# EAGLE board Procesamiento (EAGLE 7.7.0)
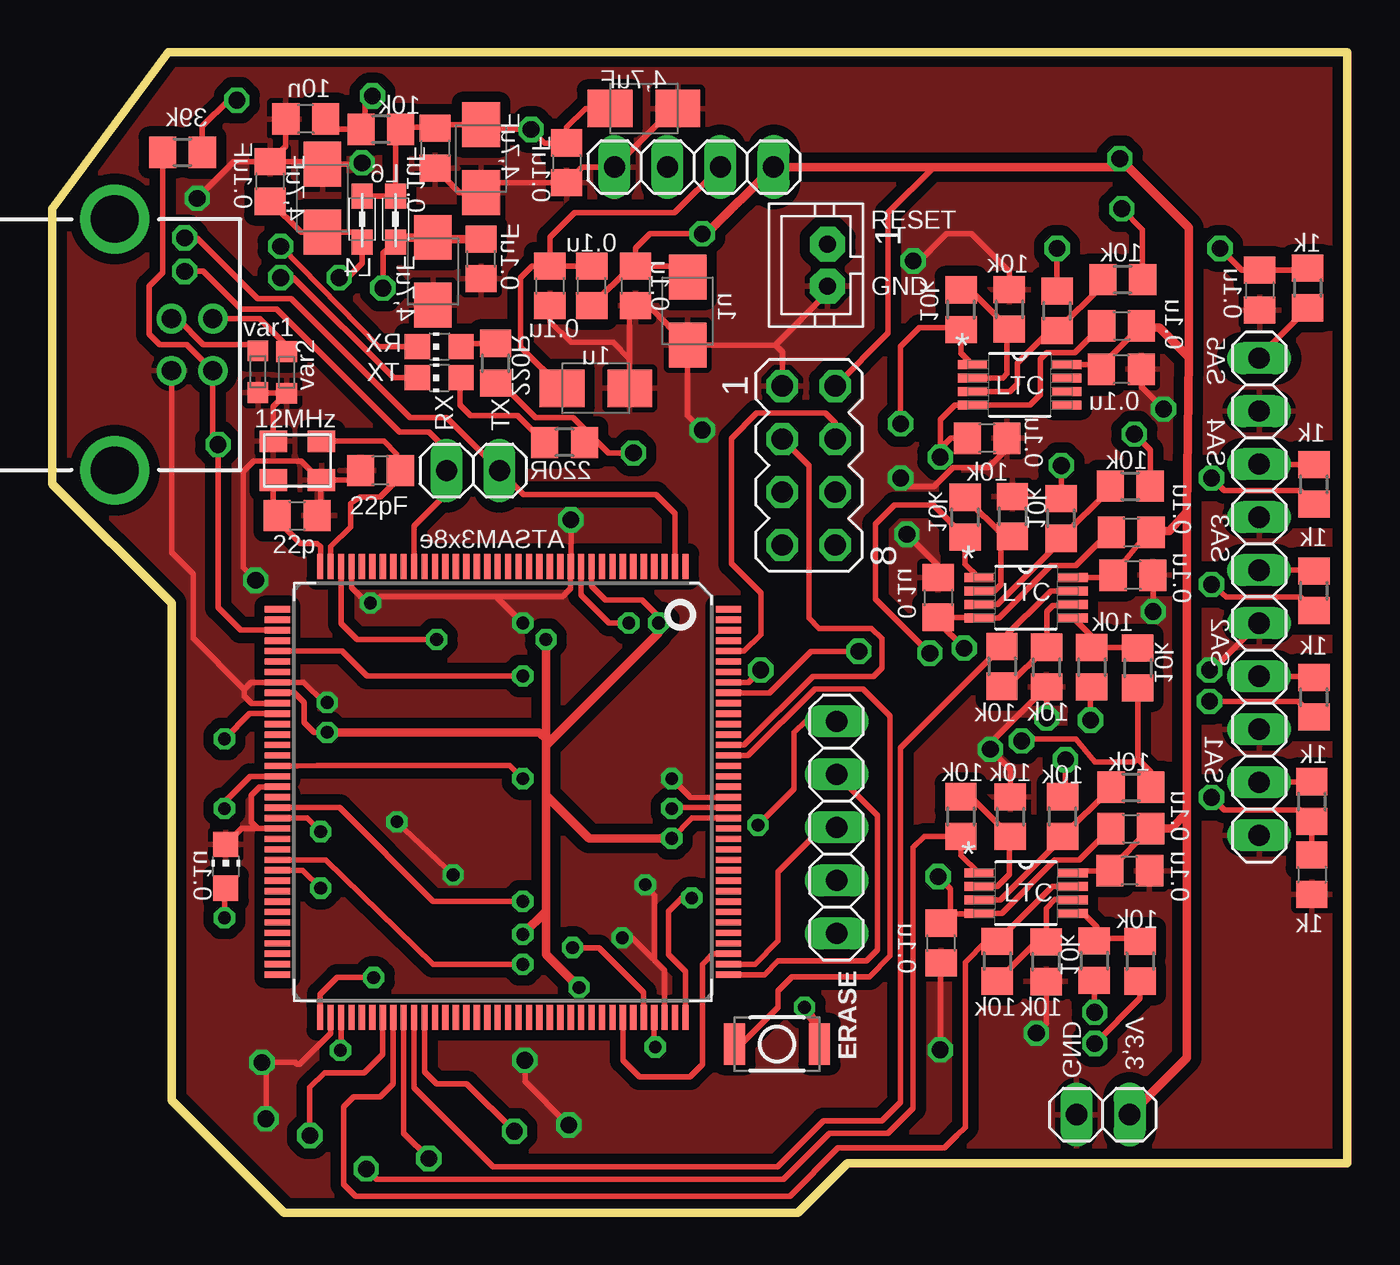
[diagram p0: board, top side]
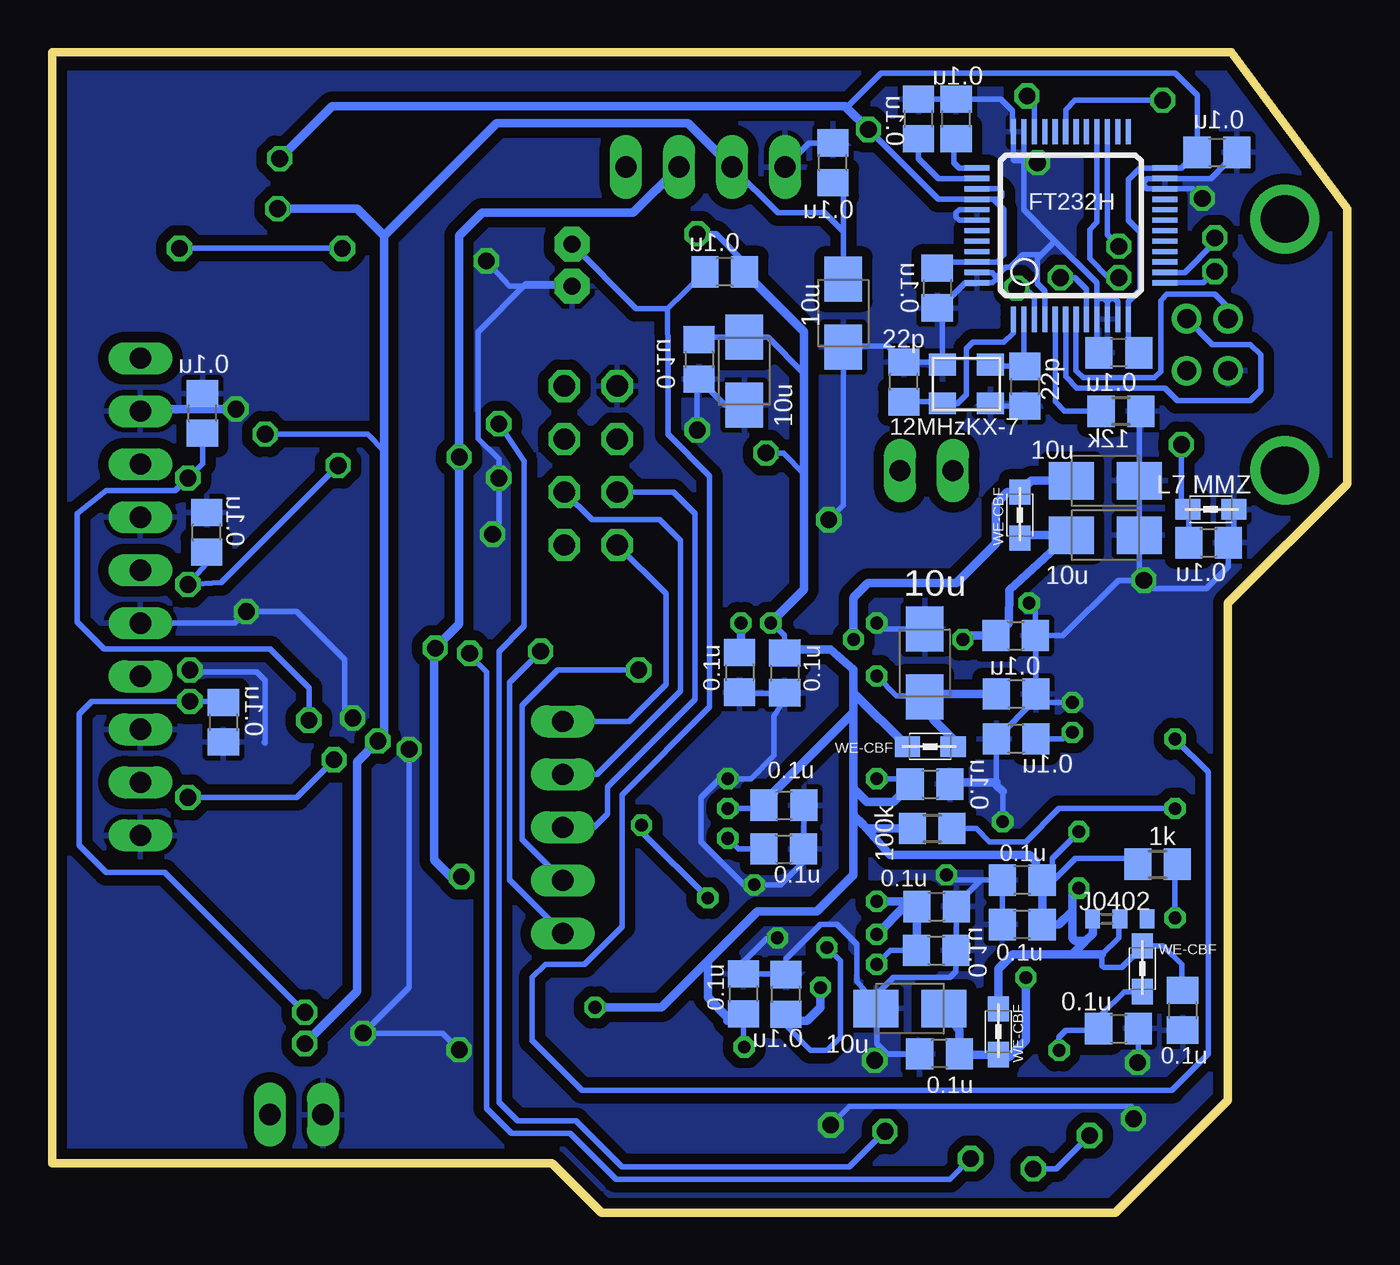
[diagram p1: board, bottom side, seen from below]

Size 62.05 x 55.6 mm. Coordinates in mm from the lower left corner, seen from the top.
Outline: 62.05,55.6 5.56,55.6 0,48.1 0,34.92 5.71,29.21 5.71,5.4 11.11,0 35.72,0 38.1,2.38 62.05,2.38 62.05,55.6
Copper layers (1*16): Top 0.035mm / dielectric 1.6mm / Bottom 0.035mm
Design rules "default *": minimum track width 10mil, minimum drill 24mil, track to track 8mil, track to pad 8mil, pad to pad 8mil, via to via 8mil, smd to smd 8mil, copper to edge 8mil, drill to drill 8mil, minimum pad ring 10mil, minimum via ring 8mil, stop-mask expansion 4mil, vias tented up to drill 0mil, thermal gap 10mil
Net classes: 1 USB: width 0.203 mm, drill 0.254 mm, clearance 0.203 mm; 2 gnd1: width 0.203 mm, drill 0.254 mm, clearance 0.203 mm; 3 usbvcc: width 0.203 mm, drill 0.254 mm, clearance 0.203 mm; 4 USBpair: width 0.203 mm, drill 0.254 mm, clearance 0.203 mm; 5 UA1: width 0.127 mm, drill 0.254 mm, clearance 0.127 mm

## Footprints (pad centres in the part's own frame; a part is rotated, then mirrored left to right if it is on the bottom)
J0402 = smd 0.7 x 0.9: 1 -0.65,0; 2 0.65,0; 3 1.95,0
C0805 = smd 1.3 x 1.5: 1 -0.95,0; 2 0.95,0
B/3528-21W = smd 2.15 x 1.8: + 1.625,0; - -1.625,0
SMD_157SW = smd 1.016 x 1.981: 1 -2.032,0; 2 2.032,0
LQFP48 = smd 0.25 x 1.2: 1 -2.75,-4.5; 2 -2.25,-4.5; 3 -1.75,-4.5; 4 -1.25,-4.5; 5 -0.75,-4.5; 6 -0.25,-4.5; 7 0.25,-4.5; 8 0.75,-4.5; 9 1.25,-4.5; 10 1.75,-4.5; 11 2.25,-4.5; 12 2.75,-4.5; 25 2.75,4.5; 26 2.25,4.5; 27 1.75,4.5; 28 1.25,4.5; 29 0.75,4.5; 30 0.25,4.5; 31 -0.25,4.5; 32 -0.75,4.5; 33 -1.25,4.5; 34 -1.75,4.5; 35 -2.25,4.5; 36 -2.75,4.5 | smd 1.2 x 0.25: 13 4.5,-2.75; 14 4.5,-2.25; 15 4.5,-1.75; 16 4.5,-1.25; 17 4.5,-0.75; 18 4.5,-0.25; 19 4.5,0.25; 20 4.5,0.75; 21 4.5,1.25; 22 4.5,1.75; 23 4.5,2.25; 24 4.5,2.75; 37 -4.5,2.75; 38 -4.5,2.25; 39 -4.5,1.75; 40 -4.5,1.25; 41 -4.5,0.75; 42 -4.5,0.25; 43 -4.5,-0.25; 44 -4.5,-0.75; 45 -4.5,-1.25; 46 -4.5,-1.75; 47 -4.5,-2.25; 48 -4.5,-2.75
1X05 = drill 1.016 long: 1 -5.08,0; 2 -2.54,0; 3 0,0; 4 2.54,0; 5 5.08,0
1X10 = drill 1.016 long: 1 -11.43,0; 2 -8.89,0; 3 -6.35,0; 4 -3.81,0; 5 -1.27,0; 6 1.27,0; 7 3.81,0; 8 6.35,0; 9 8.89,0; 10 11.43,0
1X04 = drill 1.016 long: 1 -3.81,0; 2 -1.27,0; 3 1.27,0; 4 3.81,0
1X02 = drill 1.016 long: 1 -1.27,0; 2 1.27,0
0805 = smd 1.2 x 1: 1 -1.1,0; 2 1.1,0
CHIP-LED0805 = smd 1.2 x 1.2: A 0,-1.05; C 0,1.05
JST-PH2 = drill 0.813 pad 1.676 octagon: 1 1,0; 2 -1,0
R0805 = smd 1.3 x 1.5: 1 -0.95,0; 2 0.95,0
MA04-2 = drill 1.016 octagon: 1 -3.81,-1.27; 2 -3.81,1.27; 3 -1.27,-1.27; 4 -1.27,1.27; 5 1.27,-1.27; 6 1.27,1.27; 7 3.81,-1.27; 8 3.81,1.27
SOP65P490X110-8N = smd 1.397 x 0.432: 1 -2.261,0.965; 2 -2.261,0.33; 3 -2.261,-0.33; 4 -2.261,-0.965; 5 2.261,-0.965; 6 2.261,-0.33; 7 2.261,0.33; 8 2.261,0.965
LQFP144 = smd 0.3 x 1.2: 1 -8.75,-10.8; 2 -8.25,-10.8; 3 -7.75,-10.8; 4 -7.25,-10.8; 5 -6.75,-10.8; 6 -6.25,-10.8; 7 -5.75,-10.8; 8 -5.25,-10.8; 9 -4.75,-10.8; 10 -4.25,-10.8; 11 -3.75,-10.8; 12 -3.25,-10.8; 13 -2.75,-10.8; 14 -2.25,-10.8; 15 -1.75,-10.8; 16 -1.25,-10.8; 17 -0.75,-10.8; 18 -0.25,-10.8; 19 0.25,-10.8; 20 0.75,-10.8; 21 1.25,-10.8; 22 1.75,-10.8; 23 2.25,-10.8; 24 2.75,-10.8; 25 3.25,-10.8; 26 3.75,-10.8; 27 4.25,-10.8; 28 4.75,-10.8; 29 5.25,-10.8; 30 5.75,-10.8; 31 6.25,-10.8; 32 6.75,-10.8; 33 7.25,-10.8; 34 7.75,-10.8; 35 8.25,-10.8; 36 8.75,-10.8; 73 8.75,10.8; 74 8.25,10.8; 75 7.75,10.8; 76 7.25,10.8; 77 6.75,10.8; 78 6.25,10.8; 79 5.75,10.8; 80 5.25,10.8; 81 4.75,10.8; 82 4.25,10.8; 83 3.75,10.8; 84 3.25,10.8; 85 2.75,10.8; 86 2.25,10.8; 87 1.75,10.8; 88 1.25,10.8; 89 0.75,10.8; 90 0.25,10.8; 91 -0.25,10.8; 92 -0.75,10.8; 93 -1.25,10.8; 94 -1.75,10.8; 95 -2.25,10.8; 96 -2.75,10.8; 97 -3.25,10.8; 98 -3.75,10.8; 99 -4.25,10.8; 100 -4.75,10.8; 101 -5.25,10.8; 102 -5.75,10.8; 103 -6.25,10.8; 104 -6.75,10.8; 105 -7.25,10.8; 106 -7.75,10.8; 107 -8.25,10.8; 108 -8.75,10.8 | smd 1.2 x 0.3: 37 10.8,-8.75; 38 10.8,-8.25; 39 10.8,-7.75; 40 10.8,-7.25; 41 10.8,-6.75; 42 10.8,-6.25; 43 10.8,-5.75; 44 10.8,-5.25; 45 10.8,-4.75; 46 10.8,-4.25; 47 10.8,-3.75; 48 10.8,-3.25; 49 10.8,-2.75; 50 10.8,-2.25; 51 10.8,-1.75; 52 10.8,-1.25; 53 10.8,-0.75; 54 10.8,-0.25; 55 10.8,0.25; 56 10.8,0.75; 57 10.8,1.25; 58 10.8,1.75; 59 10.8,2.25; 60 10.8,2.75; 61 10.8,3.25; 62 10.8,3.75; 63 10.8,4.25; 64 10.8,4.75; 65 10.8,5.25; 66 10.8,5.75; 67 10.8,6.25; 68 10.8,6.75; 69 10.8,7.25; 70 10.8,7.75; 71 10.8,8.25; 72 10.8,8.75; 109 -10.8,8.75; 110 -10.8,8.25; 111 -10.8,7.75; 112 -10.8,7.25; 113 -10.8,6.75; 114 -10.8,6.25; 115 -10.8,5.75; 116 -10.8,5.25; 117 -10.8,4.75; 118 -10.8,4.25; 119 -10.8,3.75; 120 -10.8,3.25; 121 -10.8,2.75; 122 -10.8,2.25; 123 -10.8,1.75; 124 -10.8,1.25; 125 -10.8,0.75; 126 -10.8,0.25; 127 -10.8,-0.25; 128 -10.8,-0.75; 129 -10.8,-1.25; 130 -10.8,-1.75; 131 -10.8,-2.25; 132 -10.8,-2.75; 133 -10.8,-3.25; 134 -10.8,-3.75; 135 -10.8,-4.25; 136 -10.8,-4.75; 137 -10.8,-5.25; 138 -10.8,-5.75; 139 -10.8,-6.25; 140 -10.8,-6.75; 141 -10.8,-7.25; 142 -10.8,-7.75; 143 -10.8,-8.25; 144 -10.8,-8.75
USB-B-PTH = drill 0.914: D+ 0,1.25; D- 1.981,1.25; GND 0,-1.25; VBUS 1.981,-1.25 | drill 2.286: P$1 -2.718,-6.02; P$2 -2.718,6.02
CRYSTAL-3.2-2.5 = smd 1.3 x 1.05: 1 -1.15,-0.925; 2 1.15,-0.925; 3 1.15,0.925; 4 -1.15,0.925
CT/CN0603 = smd 1 x 1: 1 -1,0; 2 1,0

## Placement (x,y rotation side)
BR1  NM  [J0402]  10.25,14.08 180 bottom
C1  [C0805]  51.62,16.39 180 top
C2  [C0805]  42.59,12.93 90 top
C3  [C0805]  51.67,18.41 0 top
C4  [C0805]  51.78,30.55 180 top
C5  [C0805]  42.44,29.48 270 top
C6  [C0805]  51.7,32.6 0 top
C7  [C0805]  51.22,40.41 180 top
C8  [C0805]  44.79,37.11 180 top
C9  [C0805]  51.23,42.5 0 top
C10  [C0805]  27.95,44.4 270 top
C11  [C0805]  23.84,44.4 270 top
C12  [C0805]  25.84,44.4 90 top
C13  [C0805]  24.65,50.3 90 bottom
C14  [C0805]  60.34,16.2 270 top
C15  [C0805]  53.84,23.5 270 bottom
C16  [C0805]  54.65,32.6 90 bottom
C17  [C0805]  54.84,38.3 90 bottom
C18  [C0805]  57.84,44.2 270 top
CA1  0,1u  [C0805]  31.05,40.88 270 bottom
CA2  10u  [B/3528-21W]  28.89,40.32 90 bottom
CA3  100n  [C0805]  28.92,10.49 90 bottom
CA4  100n  [C0805]  15.57,15.94 180 bottom
CA5  100n  [C0805]  15.57,13.81 180 bottom
CA6  100n  [C0805]  19.99,20.54 0 bottom
CA7  10u  [B/3528-21W]  30.45,43.2 90 top
CA8  100n  [C0805]  26.96,25.86 270 bottom
CA9  100n  [C0805]  26.99,19.53 0 bottom
CA10  100n  [C0805]  15.86,24.86 0 bottom
CA11  10u  [B/3528-21W]  20.24,26.35 270 bottom
CA12  100n  [C0805]  19.54,7.62 180 bottom
CA13  10u  [B/3528-21W]  20.95,9.79 0 bottom
CA14  10u  [B/3528-21W]  11.6,35.07 180 bottom
CA15  100n  [C0805]  19.67,14.67 0 bottom
CA16  100n  [C0805]  19.7,12.57 0 bottom
CA17  100n  [C0805]  29.11,25.89 270 bottom
CA18  100n  [C0805]  15.86,22.7 180 bottom
CA19  100n  [C0805]  26.89,10.46 90 bottom
CA20  100n  [C0805]  27,17.43 0 bottom
CA21  10n  [C0805]  29.83,45.07 180 bottom
CA22  100n  [C0805]  7.89,9.7 270 bottom
CA23  100n  [C0805]  10.97,8.83 0 bottom
CA24  22p  [C0805]  11.73,33.4 0 top
CA25  22pF  [C0805]  15.73,35.56 180 top
CA26  100n  [C0805]  15.89,27.65 0 bottom
CA27  10u  [B/3528-21W]  11.6,32.47 180 bottom
CA28  10u  [B/3528-21W]  26.05,39.5 180 top
CA29  10u  [B/3528-21W]  24.15,43.1 90 bottom
CA30  10u  [B/3528-21W]  20.55,50.5 90 top
CA31  0,1u  [C0805]  18.34,51 270 top
CA32  10u  [B/3528-21W]  18.24,45.1 90 top
CA33  0,1u  [C0805]  20.55,45.7 270 top
CA34  10u  [B/3528-21W]  12.94,48.6 270 top
CA35  10n  [C0805]  6.64,32.1 0 bottom
CA37  0,1u  [C0805]  10.45,49.4 90 top
CA38  10u  [B/3528-21W]  28.34,52.9 180 top
CA39  0,1u  [C0805]  24.65,50.3 270 top
CA40  100n  [C0805]  20.55,52.4 90 bottom
CA41  100n  [C0805]  18.74,52.4 90 bottom
CA42  100n  [C0805]  10.95,41.2 180 bottom
CA43  100n  [C0805]  6.24,50.8 0 bottom
CA44  100n  [C0805]  19.65,44.3 270 bottom
CA45  10n  [C0805]  12.15,52.4 180 top
CA46  22pF  [C0805]  15.44,39.6 270 bottom
CA47  22p  [C0805]  21.24,39.8 90 bottom
ERASE  [SMD_157SW]  34.72,8.08 180 top
IC1  FT232H  [LQFP48]  13.24,47.3 0 bottom
JP1  [1X05]  37.58,18.46 90 top
JP2  [1X10]  57.82,29.52 90 top
JP3  [1X04]  30.75,50.1 0 top
JP4  [1X02]  50.34,4.7 180 top
JP8  [1X02]  20.16,35.56 0 top
L1  MH2029-300Y  [0805]  16.72,8.68 270 bottom
L2  MH2029-300Y  [0805]  19.98,22.33 0 bottom
L3  MH2029-300Y  [0805]  9.82,11.7 270 bottom
L4  MMZ2012Y601B  [0805]  14.85,47.6 90 top
L5  MH2029-300Y  [0805]  15.69,33.43 270 bottom
L6  MMZ2012Y601B  [0805]  16.45,47.6 90 top
L7  MMZ2012Y601B  [0805]  6.54,33.7 180 bottom
ON  GREEN  [CHIP-LED0805]  8.32,16.61 0 top
ON1  GREEN  [CHIP-LED0805]  18.55,41.5 90 top
ON2  GREEN  [CHIP-LED0805]  18.55,40 90 top
P1  [JST-PH2]  37.15,45.4 90 top
R1  [R0805]  45.9,18.98 270 top
R2  [R0805]  43.54,18.99 90 top
R3  [R0805]  48.4,18.99 90 top
R4  [R0805]  51.68,20.39 0 top
R5  [R0805]  47.62,12.03 90 top
R6  [R0805]  45.27,12.05 270 top
R7  [R0805]  49.92,12.08 270 top
R8  [R0805]  52.12,12.05 270 top
R9  [R0805]  46,33.36 270 top
R10  [R0805]  43.73,33.33 90 top
R11  [R0805]  48.33,33.27 90 top
R12  [R0805]  51.65,34.81 0 top
R13  [R0805]  47.63,26.15 90 top
R14  [R0805]  45.5,26.18 270 top
R15  [R0805]  49.8,26.14 270 top
R16  [R0805]  52,26.1 270 top
R17  [R0805]  45.85,43.28 270 top
R18  [R0805]  43.54,43.27 90 top
R19  [R0805]  48.14,43.21 90 top
R20  [R0805]  51.29,44.71 0 top
R21  [R0805]  60.34,19.7 90 top
R22  [R0805]  60.45,24.7 90 top
R23  [R0805]  60.45,29.8 90 top
R24  [R0805]  60.45,34.9 90 top
R25  [R0805]  60.14,44.3 270 top
R26  [R0805]  15.74,51.9 180 top
R27  [R0805]  10.85,38.4 180 bottom
R28  [R0805]  6.24,50.8 0 top
RA1  1k  [R0805]  21.24,40.7 90 top
RA2  1k  [R0805]  24.55,36.9 180 top
RA3  1k  [R0805]  9.09,16.7 0 bottom
RA5  100k  [R0805]  19.89,18.42 180 bottom
SV1  [MA04-2]  36.25,35.8 270 top
U1  LTC6244CMS8PBF  [SOP65P490X110-8N]  46.65,15.31 0 top
U2  LTC6244CMS8PBF  [SOP65P490X110-8N]  46.65,29.47 0 top
U3  LTC6244CMS8PBF  [SOP65P490X110-8N]  46.35,39.66 0 top
UA1  ATSAM3X8EA-AU  [LQFP144]  21.59,20.16 180 top
X3  USBPTH  [USB-B-PTH]  5.71,41.59 0 top
Y1  12MHz KX-7 20pF  [CRYSTAL-3.2-2.5]  11.75,36.04 0 top
Y2  12MHzKX-7  [CRYSTAL-3.2-2.5]  18.24,39.7 0 bottom
Z1  CG0603MLC-05E  [CT/CN0603]  9.86,40.29 270 top
Z2  CG0603MLC-05E  [CT/CN0603]  11.23,40.26 270 top

## Library data of the parts
BR1 = bibaja
C1-C18 CA1-CA35 CA37-CA47 R1-R28 RA1-RA3 RA5 = rcl
ERASE UA1 Y1 Y2 = SmartPrj
IC1 = ftdichip-6
JP1-JP4 JP8 = pinhead
L1-L7 = wuerth-elektronik
ON ON1 ON2 = led
P1 = jst-ph
SV1 = con-lstb; OC_FARNELL: unknown; OC_NEWARK: unknown
U1-U3 = LTC6244CMS8PBF; AVAILABILITY: Good; DESCRIPTION: LTC6244 - Dual 50MHz, Low Noise, Rail-to-Rail, CMOS Op Amp; MF: Linear Technology; MP: LTC6244CMS8#PBF; PACKAGE: MSOP-8 Linear Technology; PRICE: 2.34 USD
X3 = usb
Z1 Z2 = varistor

## Nets
+1: C13.1 CA29.+ JP3.2 R4.2 R8.2 R12.2 R16.2 R20.2
+3,3: BR1.2 BR1.3 C1.2 C3.2 C4.2 C6.2 C7.2 C9.2 C10.1 C12.1 CA1.1 CA2.+ CA3.1 CA4.1 CA5.1 CA6.1 CA7.+ CA8.1 CA9.1 CA21.1 CA22.1 CA30.+ CA31.1 CA38.+ CA39.1 CA42.1 CA43.1 CA44.1 ERASE.1 IC1.12 IC1.24 IC1.39 IC1.40 IC1.46 JP3.4 JP4.1 L1.1 L2.1 L3.1 L4.2 L6.2 R26.1 RA1.1 RA2.1 RA3.1 RA5.2 SV1.2 U1.8 U2.8 U3.8 UA1.11 UA1.52 UA1.57 UA1.62 UA1.105 UA1.125
-3,3: C2.2 C3.1 C5.2 C6.1 C8.2 C9.1 C11.1 C12.2 CA28.+ JP3.3 U1.4 U2.4 U3.4
A0: UA1.144
A1: UA1.139
A1+: R3.1 R4.1 U1.3
A1-: R1.2 R2.2 U1.2
A2: UA1.112
A2+: R7.1 R8.1 U1.5
A2-: R5.2 R6.2 U1.6
A3+: R11.1 R12.1 U2.3
A3-: R9.2 R10.2 U2.2
A4+: R15.1 R16.1 U2.5
A4-: R13.2 R14.2 U2.6
A5+: R19.1 R20.1 U3.3
A5-: R17.2 R18.2 U3.2
AC7: IC1.31 R28.2
AD0: UA1.78
AO1: C14.1 R3.2 R21.1
AO2: C15.1 R7.2 R22.1
AO3: C16.1 R11.2 R23.1
AO4: C17.1 R15.2 R24.1
AO5: C18.1 R19.2 R25.1
AREF: BR1.1
AVREF: CA23.1 L3.2 UA1.75
CE: SV1.3 UA1.131
CLOCK: UA1.133
CSN: SV1.4 UA1.140
D+ [USBpair]: IC1.7 X3.D+ Z1.1
D- [USBpair]: IC1.6 X3.D- Z2.1
DATA: UA1.132
DL: R2.1 U1.1 UA1.79
DR: R6.1 U1.7 UA1.80
EL: R10.1 U2.1 UA1.81
EN1: UA1.135
EN2: UA1.134
EN3: UA1.102 UA1.111
ER: R14.1 U2.7 UA1.82
ERASE_S: ERASE.2 UA1.130
GND: C1.1 C2.1 C4.1 C5.1 C7.1 C8.1 C10.2 C11.2 C13.2 C14.2 C15.2 C16.2 C17.2 C18.2 CA1.2 CA2.- CA3.2 CA4.2 CA5.2 CA6.2 CA7.- CA8.2 CA9.2 CA10.2 CA11.- CA12.2 CA13.- CA14.- CA15.2 CA16.2 CA17.2 CA18.2 CA19.2 CA20.2 CA22.2 CA23.2 CA24.2 CA25.2 CA26.2 CA27.- CA28.- CA29.- CA30.- CA31.2 CA32.- CA33.2 CA34.- CA35.2 CA37.2 CA38.- CA39.2 CA40.2 CA41.2 CA42.2 CA43.2 CA44.2 CA45.2 CA46.2 CA47.2 IC1.4 IC1.9 IC1.10 IC1.11 IC1.22 IC1.23 IC1.35 IC1.36 IC1.41 IC1.42 IC1.47 IC1.48 JP2.1 JP2.3 JP2.5 JP2.7 JP2.9 JP3.1 JP4.2 L7.1 ON.C P1.2 R1.1 R5.1 R9.1 R13.1 R17.1 R27.1 SV1.1 UA1.12 UA1.33 UA1.44 UA1.46 UA1.54 UA1.58 UA1.74 UA1.106 UA1.126 X3.GND Y1.2 Y1.4 Y2.2 Y2.4 Z1.2 Z2.2
IR: R18.1 U3.1 UA1.83
LED1: UA1.20
LED2: UA1.21
LED3: UA1.1
MASTER-RESET: CA21.2 P1.1 UA1.47
MISO: JP1.5 SV1.7 UA1.108
MOSI: JP1.4 SV1.6 UA1.109
N$1: UA1.94
N$3: ON.A RA3.2
N$4: ON1.A RA1.2
N$5: ON2.A RA2.2
N$7: RA5.1 UA1.53
N$10: UA1.99
N$13: UA1.84
N$14: UA1.85
N$17: UA1.86
N$19: UA1.87
NC: SV1.8
NCS: JP1.2 UA1.137
NCS1: JP1.1 UA1.136
PC18: UA1.100
REF_H: IC1.5 R27.2
RESET: CA45.1 IC1.34 R26.2
RX: IC1.13 JP8.1 UA1.27
RXD1: UA1.5
RXL: UA1.103
RXLED: IC1.27 ON1.C
SA1: JP2.2 R21.2
SA2: JP2.4 R22.2
SA3: JP2.6 R23.2
SA4: JP2.8 R24.2
SA5: JP2.10 R25.2
SPCK: JP1.3 SV1.5 UA1.110
SS3: UA1.142
TX: IC1.14 JP8.2 UA1.2
TXD1: UA1.6
TXLED: IC1.28 ON2.C
UOTGID: UA1.129
VCCAH: CA41.1 IC1.37
VCCCORE: CA40.1 IC1.38
VDDANA: CA12.1 CA13.+ L1.2 UA1.73
VDDOUT: CA14.+ CA15.1 CA16.1 CA17.1 CA18.1 CA19.1 CA20.1 L5.1 UA1.10 UA1.45 UA1.56 UA1.61 UA1.104 UA1.124
VDDOUTMI: CA10.1 CA11.+ L2.2 UA1.41
VDDPLL: CA26.1 CA27.+ L5.2 UA1.34
VPHY: CA32.+ CA33.1 IC1.3 L6.1
VPLL: CA34.+ CA37.1 IC1.8 L4.1
XIN: CA24.1 UA1.36 Y1.1
XIN1: CA47.1 IC1.1 Y2.1
XOUT: CA25.1 UA1.35 Y1.3
XOUT1: CA46.1 IC1.2 Y2.3
XUSB [usbvcc]: CA35.1 L7.2 R28.1 UA1.39 X3.VBUS

## Tracks (layer width: path | path; a pad name or v marks a point on that pad's centre or on a via)
+1  (via drill 0.8)
  Top 0.254: R12.2 52.6,36.55 v51.84,37.3 | R20.2 52.24,47.11 v51.25,48.1 | R4.2 52.63,21.12 52,21.75 | 52,21.75 51.84,21.6 49.95,21.6 49.05,22.7 46.55,22.7 v46.45,22.6 | v49.95,8.1 52.12,10.28 R8.2 | R16.2 52,21.75
  Bottom 0.254: v51.84,37.3 46.95,37.3 46.15,36.5 | JP3.2 27.27,47.9 25.05,47.9 24.15,47 | CA29.+ 24.15,47 | 24.15,47 24.15,48.85 C13.1
  Bottom 0.406: 46.15,46.8 40.75,52.2 31.58,52.2 JP3.2 | 46.15,46.8 46.15,36.5 46.15,22.9 v46.45,22.6 47.45,21.6 47.45,10.6 v49.95,8.1 | v51.25,48.1 47.45,48.1 46.15,46.8
+3,3  (via drill 0.61, 0.8)
  Top 0.254: UA1.105 28.84,7.99 v28.89,7.94 | v12.86,15.56 12.01,16.41 UA1.62 | UA1.125 29.73,19.41 v29.69,19.37 | UA1.57 12.2,18.91 v12.86,18.26 | 10.81,21.43 UA1.52 11.73,21.41 12.7,21.43 21.91,21.43 v22.54,20.8 | UA1.11 25.34,29.59 26.67,28.26 v27.62,28.26 | U1.8 49.02,16.39 C1.2 50.67,16.46 C3.2 | C6.2 52.55,32.67 C4.2 50.31,30.43 U2.8 | U3.8 50.05,40.63 C7.2 50.27,40.59 C9.2 | C10.1 27.74,45.35 C12.1 | 27.45,45.84 C10.1 | C10.1 29.92,45.35 CA7.+ | C10.1 27.95,46.2 28.65,46.9 v31.15,46.9 31.36,46.9 | 16.74,51.95 R26.1 16.45,51.65 L6.2 | SV1.2 40.05,42.14 40.05,47.9 42.25,50.1 | RA2.1 25.49,37.55 | 25.49,37.55 24.95,38.1 23.15,38.1 21.49,39.75 RA1.1 | CA38.+ 25.55,52.9 24.65,52 CA39.1 23.59,51.25 v22.95,51.9 20.42,51.9 20.37,51.95 CA30.+ 18.52,52.13 CA31.1 18.3,52 17.05,52 16.45,51.4 L6.2 | L6.2 16.34,48.9 | 25.49,37.55 26.65,36.4 v27.84,36.4 | L4.2 L6.2
  Top 0.406: 36.51,7.85 ERASE.1 36.75,8.81 v36.04,9.84 | C9.2 52.27,42.4 53.05,42.4 54.45,41 | 52.55,32.67 53.51,32.67 54.34,33.6 | 54.34,33.6 54.45,41 | 54.45,41 54.45,47.2 51.55,50.1 | C3.2 53.65,18.41 54.34,19.2 | 54.34,19.2 54.34,33.6 | JP4.1 54.34,7.43 54.34,19.2 | 31.36,46.9 JP3.4 42.25,50.1 51.55,50.1 | 51.55,50.1 v51.15,50.5
  Bottom 0.254: 14.56,16.03 CA4.1 | RA3.1 10.33,16.99 13.02,16.99 14.22,15.78 CA4.1 | 14.24,15.4 CA4.1 | CA4.1 14.13,16.27 14.13,16.99 v12.86,18.26 | 20.69,20.48 arc-90 CA6.1 20.88,20.8 v22.54,20.8 | CA8.1 26.96,27.65 27.56,28.26 v27.62,28.26 | CA9.1 28.1,19.37 v29.69,19.37 | v28.89,7.94 28.92,7.97 CA3.1 | CA1.1 30.95,41.94 CA2.+ 27.76,41.94 26.02,40.2 | CA22.1 7.94,10.7 7.94,11.91 8.83,12.8 L3.1 9.9,12.64 10.79,11.75 11.67,11.75 11.75,11.83 11.75,12.38 10.95,13.18 10.95,14.03 arc90 BR1.2 | CA21.1 28.95,45.14 28.95,45.6 30.25,46.9 v31.15,46.9 | v22.95,51.9 19.59,48.55 IC1.40 16.95,48.55 | CA42.1 10.49,41.7 IC1.12 10.49,43.65 9.95,44.2 9.95,47 10.49,47.55 10.49,49.5 9.95,50.05 IC1.24 7.95,50.05 CA43.1 7.2,53.55 8.24,54.6 22.34,54.6 23.99,52.95 | CA44.1 19.34,45.55 IC1.46 16.8,45.55 16.45,45.9 16.45,48.05 16.95,48.55 | 16.95,48.55 16.7,48.55 16.55,48.7 16.55,48.9 16.7,49.05 IC1.39 | v27.84,36.4 27.02,36.4 26.02,35.4
  Bottom 0.406: 30.64,12.06 28.26,14.45 25.4,14.45 23.65,16.19 23.65,19.05 | 30.64,12.06 30.64,10.32 29.69,9.37 | 29.69,9.37 29.07,9.37 CA3.1 | 29.69,9.37 29.69,9.21 | CA9.1 27.94,19.37 27.62,19.69 27.62,20 23.65,23.97 | 23.65,23.97 23.65,24.9 | 23.65,19.05 23.65,20.32 | 23.65,20.32 23.65,23.97 | L1.1 16.72,11.69 16.02,12.38 13.18,12.38 | 12.54,13.02 13.02,13.02 13.18,13.18 13.18,14.45 | 12.54,13.02 12.2,13.36 BR1.3 | 13.18,14.45 13.81,13.81 CA5.1 CA4.1 14.92,16.11 14.92,16.83 15.24,17.14 21.91,17.14 23.03,18.41 | 13.18,14.45 13.18,15.24 v12.86,15.56 | 23.03,18.41 23.18,18.57 23.65,19.05 | RA5.2 23.02,18.41 23.03,18.41 | CA6.1 20.89,20.54 21.75,19.68 23.02,19.68 23.65,20.32 | 23.65,24.9 23.65,26.03 24.77,26.99 27.1,26.99 CA8.1 | 23.65,24.9 L2.1 | v27.62,28.26 26.02,29.86 26.02,35.4 26.02,40.2 26.02,42.21 CA21.1 | 30.64,12.06 32.86,9.84 v36.04,9.84 | 13.18,12.38 12.54,13.02 | 11.75,12.38 13.18,12.38 | v51.15,50.5 48.65,53 24.05,53 23.99,52.95 v22.95,51.9
-3,3  (via drill 0.8)
  Top 0.254: C3.1 49.22,16.9 48.05,16.9 45.49,14.35 U1.4 44.37,14.33 43.04,14.33 | C6.1 50.65,32.61 49.05,31 47.84,31 45.35,28.5 U2.4 44.37,28.53 C5.2 42.44,28.3 v43.7,27.05 | U3.4 | C11.1 23.84,46.73 25.02,47.9 29.82,47.9 JP3.3 | C12.2 C11.1 | C11.1 22.99,45.35 22.45,44.8 22.45,41.48 CA28.+ | C8.2 43.05,37.11 42.55,36.6 v42.55,36.2 42.55,38 43.24,38.7 U3.4 | 43.04,14.33 C2.2 | 43.04,14.33 43.04,15.51 v42.45,16.1 | C9.1 48.98,41.2 47.65,41.2 47.34,40.9 47.34,39.2 46.84,38.7 U3.4
  Bottom 0.254: v43.7,27.05 43.75,27 | v42.45,16.1 42.95,16.1
  Bottom 0.406: 43.75,27 43.75,16.9 42.95,16.1 | JP3.3 34.22,47.9 41.45,47.9 42.55,46.8 v42.55,36.2 42.55,28.2 v43.7,27.05
A1+
  Top 0.254: U1.3 45.42,14.98 48.4,17.96 R3.1 50.73,20.36 R4.1
A1-
  Top 0.254: U1.2 45.28,15.64 45.84,16.2 45.84,17.97 R1.2 43.99,19.94 R2.2
A2+
  Top 0.254: U1.5 49.4,14.35 50.05,13.7 50.05,13.16 | 50.05,13.16 R7.1 | 50.05,13.16 51.96,13.16 R8.1
A2-
  Top 0.254: R6.2 47.15,12.98 R5.2 47.62,14.57 48.05,15 48.89,15 U1.6
A3+
  Top 0.254: 48.06,32.32 R11.1 | U2.3 45.28,29.14 48.33,32.19 R11.1 | R11.1 50.7,34.68 R12.1
A3-
  Top 0.254: 45.95,32.36 R9.2 | R9.2 45.6,32.41 R10.2 | U2.2 45.14,29.8 45.45,30.1 45.45,31.86 R9.2
A4+
  Top 0.254: U2.5 49.8,27.62 R15.1 51.96,27.09 R16.1
A4-
  Top 0.254: U2.6 48.88,29.1 47.95,29.1 47.65,28.8 47.65,27.11 R13.2 45.77,25.23 R14.2
A5+
  Top 0.254: R20.1 50.34,44.45 R19.1 47.8,42.26 46.25,40.7 46.25,39.7 45.88,39.33 U3.3
A5-
  Top 0.254: U3.2 45.54,39.99 45.75,40.2 45.75,42.22 R17.2 43.96,44.22 R18.2
AC7  (via drill 0.8)
  Top 0.254: R28.2 7.2,52.05 8.45,53.3 v8.85,53.3
  Bottom 0.254: IC1.31 13.49,52.85 13.04,53.3 v8.85,53.3
AO1  (via drill 0.8)
  Top 0.254: 48.45,19.98 R3.2 48.55,20.08 v48.55,21.7 | v55.55,19.9 56.15,19.3 59.8,19.3 R21.1 C14.1
  Bottom 0.254: v55.55,19.9 50.34,19.9 v48.55,21.7
AO2  (via drill 0.8)
  Top 0.254: R22.1 59.7,24.5 v55.45,24.5 | v49.95,9.6 49.92,9.63 R7.2
  Bottom 0.254: v49.95,9.6 56.65,16.3 59.45,16.3 60.75,17.6 60.75,23.9 60.14,24.5 v55.45,24.5 53.9,24.5 C15.1 54,24.6
AO3  (via drill 0.8)
  Top 0.254: R23.1 59.8,29.5 56.25,29.5 v55.55,30.1 | v48.34,35.8 48.34,34.23 R11.2
  Bottom 0.254: v48.34,35.8 53.95,30.2 v55.55,30.1 54.65,31.1 C16.1
AO4  (via drill 0.8)
  Top 0.254: R24.1 59.8,34.6 56.15,34.6 v55.55,35.2 | R15.2 49.75,25.13 v49.75,23.6
  Bottom 0.254: v49.75,23.6 49.75,25.13 51.61,27 59.55,27 60.84,28.3 60.84,28.8 60.84,29.8 60.84,33.5 59.45,34.6 56.15,34.6 v55.55,35.2 54.84,35.9 C17.1
AO5  (via drill 0.8)
  Top 0.254: v48.15,46.2 v48.14,46.2 R19.2 | R25.1 60.05,45.15 C18.1 57,45.15 v55.95,46.2
  Bottom 0.254: v55.95,46.2 v48.15,46.2
AVREF  (via drill 0.61)
  Top 0.254: UA1.75 13.84,8.07 v13.81,7.78
  Bottom 0.254: L3.2 10.68,10.6 11.75,9.52 11.75,8.68 CA23.1 | 11.82,8.73 CA23.1 | CA23.1 12.01,8.73 13.49,8.73 13.81,8.41 v13.81,7.78
CE
  Top 0.254: UA1.131 33.15,22.41 36.45,25.7 39.34,25.7 39.75,26.1 39.75,27.5 39.25,28 36.75,28 36.25,28.5 36.25,30.1 36.25,31.2 36.25,35.8 SV1.3
CSN
  Top 0.254: UA1.140 33.15,26.91 33.95,27.7 33.95,29.7 32.55,31.1 32.55,37.1 33.75,38.3 37.05,38.3 37.52,37.83 SV1.4
D+
  Top 0.254: Z1.1 9.77,41.6 7.24,41.6 6.01,42.84 X3.D+
  Bottom 0.254: IC1.7 12.99,40.35 12.65,40 9.24,40 8.95,40.3 8.95,43.7 8.64,44 6.35,44 5.74,43.4 5.74,42.87 X3.D+
D-
  Top 0.254: X3.D- 9.95,42.84 11.23,41.55 Z2.1
  Bottom 0.254: IC1.6 13.49,40.05 12.94,39.5 8.74,39.5 8.14,38.9 4.64,38.9 4.14,39.4 4.14,41.1 4.64,41.6 6.46,41.6 X3.D-
DL  (via drill 0.8)
  Top 0.254: U1.1 43.54,17.13 R2.1 41.78,18.04 41.25,17.5 41.25,5 40.05,3.8 37.25,3.8 35.05,1.6 15.54,1.6 v15.04,2.1 | v12.35,3.7 12.35,6 13.04,6.7 14.94,6.7 15.84,7.6 UA1.79
  Bottom 0.254: v15.04,2.1 13.94,2.1 v12.35,3.7
DR
  Top 0.254: UA1.80 16.34,6.18 15.72,5.56 14.45,5.56 13.97,5.08 13.97,1.38 14.54,0.8 35.34,0.8 37.65,3.1 42.75,3.1 42.9,3.25 43.34,3.7 43.75,4.1 43.75,12 44.74,13 R6.1 47.91,15.64 U1.7
EL  (via drill 0.8)
  Top 0.254: UA1.81 16.84,3.81 v18.05,2.6 | U2.1 43.73,31.09 R10.1 42.21,33.9 40.34,33.9 39.45,33 39.45,29.4 v42.05,26.8
  Bottom 0.254: v18.05,2.6 19.05,1.6 35.05,1.6 37.25,3.8 40.05,3.8 41.25,5 41.25,25.9 42.05,26.7 v42.05,26.8
EN3
  Top 0.254: UA1.102 27.34,7.31 28.15,6.5 30.55,6.5 31.15,7.1 31.15,11.9 31.65,12.4 UA1.111
ER
  Top 0.254: UA1.82 17.34,6 21.13,2.2 34.75,2.2 36.95,4.4 39.75,4.4 40.65,5.3 40.65,22.27 R14.1 45.5,27.46 47.84,29.8 U2.7
ERASE_S
  Top 0.254: UA1.130 33.33,21.91 33.34,21.91 36.53,25.1 38.84,25.1 40.15,23.8 40.15,12.3 39.15,11.3 35.43,11.3 34.77,10.64 34.77,9.84 32.69,7.77 ERASE.2
GND  (via drill 0.61, 0.8)
  Top 0.254: 9.21,25.08 9.54,25.41 UA1.44 12.05,25.41 13.02,24.45 v13.18,24.45 | 9.21,25.08 9.21,24.76 9.56,24.41 UA1.46 | UA1.54 9.93,20.41 9.53,20 9.53,18.73 9.84,18.41 | UA1.33 14.34,29.95 15.08,29.21 v15.24,29.21 15.72,29.53 21.27,29.53 | 21.27,29.53 24.45,29.53 24.84,29.92 UA1.12 v24.84,33.2 | v29.69,20.8 30.57,19.91 UA1.126 | 8.1,17.88 ON.C 9.08,18.41 9.84,18.41 | v28.42,15.72 28.86,15.21 28.86,12.22 | 28.86,12.22 28.86,12.09 29.34,11.62 UA1.106 | v27.3,13.18 27.78,13.18 28.73,12.22 28.86,12.22 | 9.84,18.41 UA1.58 | CA25.2 14.33,35.11 Y1.2 12.86,35.07 | v22.54,28.26 21.27,29.53 | v16.51,18.73 v19.21,16.19 | 10.47,36.99 Y1.4 | 12.86,35.07 12.86,33.73 CA24.2 | 10.82,37.12 10.83,37.12 10.75,37.12 Y1.4 | v31.15,37.5 30.45,38.2 CA7.- | CA7.- 28.57,43.45 C10.2 27.67,43.18 27.67,40.9 | 34.64,41.58 CA7.- | C4.1 52.75,30.53 v52.75,28.8 | C7.1 52.17,39.58 v53.25,38.5 | R5.1 47.62,9.07 v47.15,8.6 | v42.55,7.8 42.55,11.94 C2.1 | R1.1 45.9,21.25 v44.95,22.2 44.95,22.51 R13.1 v47.65,23.7 | C5.1 42.44,31 v40.95,32.5 | UA1.74 13.34,8.6 11.85,7.1 11.74,7.1 11.64,7.2 v10.04,7.2 10.24,7 v10.24,4.5 | v24.74,4.2 22.65,6.3 v22.65,7.3 | 34.64,41.58 37.15,44.08 P1.2 | JP2.5 55.58,26 v55.45,26 | R17.1 45.85,45.1 44.05,46.9 42.84,46.9 41.34,45.4 | SV1.1 34.98,41.24 34.64,41.58 | X3.GND 5.71,31.63 6.74,30.6 6.74,27.54 9.21,25.08 | CA28.- 27.67,40.9 | C11.2 23.84,42.7 24.84,41.7 26.87,41.7 27.67,40.9 | CA31.2 19.52,48.88 CA30.- 21.02,49.35 CA39.2 25.4,50.1 JP3.1 29.73,52.9 CA38.- | Z1.2 9.89,39.26 Z2.2 10.6,38.63 Y1.4 | CA37.2 8.7,50.35 v6.95,48.6 | CA37.2 11.2,51.1 CA45.2 | CA37.2 12.82,50.35 CA34.- 14.77,50.23 v14.85,50.3 | 12.86,35.07 11.93,36 9.64,36 9.14,35.5 9.14,30.9 v9.74,30.3
  Top 0.254: C8.1 45.74,36.6 44.84,35.7 43.15,35.7 42.25,34.8 41.05,34.8 v40.65,35.2 | 41.25,45.3 41.34,45.4 | 41.34,45.4 v41.25,45.6
  Bottom 0.254: 26.03,17.42 CA20.2 | CA5.2 CA4.2 17.56,15.94 | 22.57,10 22.57,10.45 21.75,11.27 19.05,11.27 18.75,11.57 CA16.2 18.72,12.44 CA15.2 18.41,14.36 18.41,15.08 17.56,15.94 | 22.57,10 CA13.- 22.54,9.44 22.54,8.1 22.07,7.62 CA12.2 | 17.56,15.94 18.95,15.94 v19.21,16.19 | CA10.2 15,24.76 15.08,24.45 16.65,22.87 CA18.2 16.81,20.64 16.81,20.48 | CA10.2 14.91,25.89 14.92,26.19 14.92,27.35 CA26.2 | CA11.- 22.26,27.97 v22.54,28.26 | v13.18,24.45 14.53,24.45 CA10.2 | CA20.2 26.05,16.81 27.15,15.72 v28.42,15.72 28.89,15.72 30.96,17.78 30.96,19.91 30.07,20.8 v29.69,20.8 28.58,20.8 27.46,21.91 27.46,23.81 27.15,24.29 27.15,24.88 | v27.3,13.18 27.78,13.18 28.92,12.03 CA3.2 26.92,11.44 CA19.2 26.89,12.16 25.24,13.81 24.45,13.81 23.49,12.86 23.49,11.08 22.57,10 | v15.24,29.21 14.94,28.91 CA26.2 | CA26.2 13.62,27.65 10.97,30.3 v9.74,30.3 | CA9.2 26.04,17.44 CA20.2 | v16.51,18.73 16.51,20.18 | 27.15,24.88 CA8.2 | 27.15,24.88 29.06,24.88 CA17.2 | 10.95,35.24 10.46,34.75 10.29,34.75 CA14.- | CA14.- CA27.- 9.97,30.53 v9.74,30.3 | CA2.- 29.82,38.69 CA1.2 31.15,39.84 v31.15,37.5 | JP2.5 53.3,28.24 v52.75,28.8 50.34,28.8 48.05,26.5 48.05,24.1 v47.65,23.7 | 57.72,38.5 JP2.9 | v42.55,7.8 43.34,8.6 v47.15,8.6 44.95,10.8 v44.95,22.2 | CA23.2 10.02,7.23 v10.04,7.2 | v10.24,4.5 10.35,5.1 23.84,5.1 v24.74,4.2 | v22.65,7.3 22.34,7.6 20.24,7.6 | v55.45,26 55.34,25.9 52.25,25.9 51.84,25.5 51.84,22.5 51.9,22.55 | IC1.9 11.99,43.45 | 16.84,44.8 16.84,44.7 16.99,44.55 IC1.48 17.8,44.5 18.34,44.5 19.4,43.45 19.4,43.1 | 16.84,44.8 16.99,45.05 IC1.47 | IC1.11 10.99,43.65 11.14,43.8 11.35,43.8 11.49,43.65 | IC1.10 11.49,43.65
  Bottom 0.254: IC1.9 11.99,43.75 11.95,43.8 11.64,43.8 11.49,43.65 | IC1.41 18.59,48.05 18.74,47.9 18.74,47.7 18.59,47.55 IC1.42 | CA43.2 6.54,49.55 IC1.23 9.6,49.55 9.74,49.4 9.74,49.2 9.6,49.05 IC1.22 7.39,49.05 v6.95,48.6 | IC1.9 11.99,41.3 CA42.2 | JP3.1 25.78,51.25 C13.2 | 19.4,43.1 Y2.4 19.52,40.75 CA47.2 22.02,41.52 23.24,41.52 CA29.- 24.15,33.9 v24.84,33.2 | 19.4,43.1 CA44.2 | CA40.2 CA41.2 16.59,53.35 16.05,52.8 16.05,51.85 IC1.36 15.99,50.45 15.94,50.4 15.54,50.4 15.49,50.45 | 15.49,50.45 15.49,50.7 | 15.49,50.7 IC1.35 | R27.1 9.97,38.33 CA14.- | L7.1 5.45,32.35 CA35.2 5.7,30.95 6.74,29.9 9.35,29.9 v9.74,30.3 | v40.95,32.5 40.65,32.8 v40.65,35.2 40.65,36.1 41.65,37.1 41.65,42.2 39.34,44.5 37.25,44.5 P1.2 40.14,44.4 v41.25,45.6 | IC1.9 11.99,44.55 14.1,46.65 | 14.1,46.65 15.49,48.05 15.49,50.45 | IC1.4 14.49,44.15 14.85,44.5 14.85,45.7 14.65,45.9 | 14.65,45.9 14.1,46.45 14.1,46.65 | 14.65,45.9 15.54,45.9 16.15,45.3 16.34,45.3 16.84,44.8 | v14.85,50.3 15.1,50.3 15.49,50.7 | CA46.2 16.97,38.65 Y2.2
  Bottom 0.406: CA6.2 18.8,20.62 16.81,20.62 16.81,20.64 | 16.81,20.48 16.51,20.18 | v53.25,38.5 57.72,38.5
  pour Bottom (isolate 0.508): 0,48.1 5.56,54.6 62.05,54.6 62.05,2.38 38.1,2.38 35.72,0 11.11,0 5.71,5.4 5.71,29.21 0,34.92
  pour Top (isolate 0.508): 0,48.1 5.56,55.6 62.05,55.6 62.05,2.38 38.1,2.38 35.72,0 11.11,0 5.71,5.4 5.71,29.21 0,34.92
IR  (via drill 0.8)
  Top 0.254: UA1.83 17.84,6.77 18.41,6.19 19.86,6.19 v22.15,3.9 | U3.1 43.54,41.18 R18.1 43.45,42.4 41.55,42.4 40.65,41.5 v40.65,37.8
  Bottom 0.254: v22.15,3.9 23.84,2.2 34.75,2.2 36.95,4.4 39.75,4.4 40.65,5.3 40.65,26.9 39.45,28.1 39.45,36 v40.65,37.8
MASTER-RESET  (via drill 0.61)
  Top 0.254: UA1.47 9.46,23.91 v8.26,22.7
  Bottom 0.254: v8.26,22.7 6.67,21.11 6.67,7.62 8.41,5.87 36.67,5.87 39.05,8.25 39.05,11.27 38.42,11.9 36.55,11.9 34.75,13.7 34.75,20.02 30.55,24.22 30.55,35.3 32.54,37.3 32.54,40.8 32.56,43.33 | CA21.2 32.56,43.33 | 32.56,43.33 34.07,43.33 P1.1
MISO  (via drill 0.61)
  Top 0.254: UA1.108 30.34,11.57 29.53,12.38 29.53,14.45 30.16,15.08 v30.64,15.08 | v33.81,18.57 35.55,20.3 35.55,23 36.09,23.54 JP1.5
  Bottom 0.254: v30.64,15.08 33.81,18.26 v33.81,18.57 | SV1.7 32.65,29.66 32.65,25.3 34.4,23.54 JP1.5
MOSI
  Top 0.254: UA1.109 34.11,11.41 34.77,12.06 39.01,12.06 39.55,12.6 39.55,19.04 JP1.4
  Bottom 0.254: JP1.4 35.94,21 31.95,25 31.95,32.2 32.95,33.2 36.19,33.2 SV1.6
N$3  (via drill 0.61)
  Top 0.254: ON.A 8.26,15.49 v8.26,14.13
  Bottom 0.254: v8.26,14.13 8.26,16.59 RA3.2
N$4
  Top 0.254: 19.99,41.4 ON1.A 19.74,41.65 RA1.2
N$5
  Top 0.254: RA2.2 22.3,38.2 20.05,38.2 19.55,38.7 19.55,39.95 ON2.A
N$7  (via drill 0.61)
  Top 0.254: UA1.53 9.48,20.91 8.26,19.68 v8.26,19.37
  Bottom 0.254: v8.26,19.37 13.81,19.37 15.4,17.78 17.15,17.78 17.78,18.41 RA5.1
NCS  (via drill 0.8)
  Top 0.254: UA1.137 33.35,25.41 v33.95,26
  Bottom 0.254: JP1.2 39.55,17.89 39.55,24.3 37.84,26 v33.95,26
NCS1  (via drill 0.8)
  Top 0.254: UA1.136 34.35,24.91 36.34,26.9 v38.65,26.9
  Bottom 0.254: JP1.1 40.15,15.95 40.15,25.4 v38.65,26.9
REF_H
  Bottom 0.254: R27.2 13.54,38.4 13.99,38.85 IC1.5
RESET  (via drill 0.8)
  Top 0.254: CA45.1 13.6,51.9 R26.2 14.99,52.1 14.99,53.15 v15.35,53.5
  Bottom 0.254: IC1.34 14.99,53.15 v15.35,53.5
RX  (via drill 0.8)
  Top 0.254: UA1.27 17.34,32.9 18.89,34.45 JP8.1 18.89,36.56 18.05,37.4 16.65,37.4 10.74,43.3 9.04,43.3 7.24,45.1 v6.35,45.1
  Bottom 0.254: v6.35,45.1 6.89,44.55 IC1.13
RXLED  (via drill 0.8)
  Top 0.254: v10.95,46.3 15.65,41.5 ON1.C
  Bottom 0.254: v10.95,46.3 11.49,46.85 IC1.27
SA1
  Top 0.254: R21.2 57.85,20.65 JP2.2
SA2
  Top 0.254: JP2.4 60.39,25.7 R22.2
SA3
  Top 0.254: R23.2 60.41,30.78 JP2.6
SA4
  Top 0.254: R24.2 57.83,35.85 JP2.8
SA5
  Top 0.254: 57.83,40.95 JP2.10 57.82,41.03 R25.2
SPCK
  Top 0.254: UA1.110 33.66,11.91 34.77,13.02 34.77,16.32 36.91,18.46 JP1.3
  Bottom 0.254: JP1.3 36.08,18.46 35.45,19.1 35.45,20.4 31.25,24.6 31.25,33.5 32.27,34.53 SV1.5
TX  (via drill 0.8)
  Top 0.254: UA1.2 29.84,33.5 28.94,34.4 22.59,34.4 JP8.2 18.89,38.1 17.15,38.1 11.45,43.8 9.85,43.8 6.95,46.7 v6.35,46.7
  Bottom 0.254: IC1.14 7.79,45.05 6.35,46.5 v6.35,46.7
TXLED  (via drill 0.8)
  Top 0.254: ON2.C 16.34,40 11.54,44.8 v10.95,44.8
  Bottom 0.254: IC1.28 11.99,47.45 12.35,47.1 12.35,45.7 11.45,44.8 v10.95,44.8
VCCAH
  Bottom 0.254: IC1.37 18.59,50.05 18.84,50.3 18.84,51.35 CA41.1
VCCCORE
  Bottom 0.254: IC1.38 19.59,49.55 20.55,50.5 CA40.1
VDDANA  (via drill 0.61)
  Top 0.254: UA1.73 12.84,10.46 13.65,11.27 v15.4,11.27
  Bottom 0.406: v15.4,11.27 15.4,8.25 16.19,7.46 16.68,7.46 L1.2 | L1.2 16.92,7.46 | L1.2 18.55,7.58 CA12.1 18.59,8.74 CA13.+
VDDOUT  (via drill 0.61)
  Top 0.254: 10.78,24.92 UA1.45 11.59,24.92 12.06,24.45 12.06,23.49 12.54,23.02 v13.18,23.02 | UA1.61 13.09,16.91 18.26,11.91 v22.54,11.91 | v29.69,17.94 30.66,18.91 UA1.124 | UA1.10 25.84,30.04 26.51,29.37 28.26,29.37 29.05,28.57 v29.05,28.26 | v22.54,14.92 18.26,14.92 13.77,19.41 UA1.56 | UA1.104 28.34,10.55 26.19,12.7 v24.92,12.7
  Top 0.406: v13.18,23.02 23.34,23.02 23.65,22.7 | v22.54,13.33 23.65,14.45 | 23.65,14.45 23.65,20 | v29.69,17.94 25.72,17.94 23.65,20 | 23.65,14.45 23.65,12.38 v25.24,10.79 | 23.65,20 23.65,22.38 | v23.65,27.46 23.65,22.7 | 23.65,22.7 23.65,22.38 | 23.65,22.38 29.05,27.78 v29.05,28.26
  Bottom 0.254: CA20.1 29.18,17.43 v29.69,17.94 | CA19.1 26.89,8.99 25.72,7.78 24.92,7.78 24.29,8.41 24.29,12.06 v24.92,12.7 | CA18.1 13.65,22.7 v13.18,23.02 | CA16.1 21.88,12.57 v22.54,11.91
  Bottom 0.406: CA19.1 26.36,9.2 26.35,9.21 25.88,9.21 25.24,9.84 v25.24,10.79 | CA17.1 29.05,27.06 v29.05,28.26 | v22.54,14.92 21.03,14.92 CA15.1 | CA15.1 20.62,12.6 CA16.1 | 20.89,14.35 CA15.1 | v23.65,27.46 23.65,29.47 22.96,30.16 18.73,30.16 16.83,32.07 16.83,33.97 16.27,34.53 L5.1 15.13,35.08 CA14.+ | v22.54,13.33 21.21,14.67 CA15.1
VDDOUTMI  (via drill 0.61)
  Top 0.254: UA1.41 13.89,26.91 15.08,25.72 v22.54,25.72
  Bottom 0.254: CA11.+ 20.13,24.76 21.59,24.76 v22.54,25.72
  Bottom 0.406: CA10.1 19.75,24.86 | 20,24.64 CA11.+ 19.75,24.86 | L2.2 18.88,22.69 19.84,23.65 19.84,24.64 19.75,24.86
VDDPLL  (via drill 0.61)
  Top 0.254: UA1.34 13.84,28.23 14.6,27.46 v18.41,27.46
  Bottom 0.406: v18.41,27.46 18.07,27.65 CA26.1 16.2,28.27 16.19,29.84 13.97,31.88 13.81,31.88 CA27.+ 15.55,32.47 L5.2
VPHY  (via drill 0.8)
  Top 0.254: L6.1 15.85,46 v15.85,44.3
  Top 0.406: L6.1 16.45,46.73 CA32.+ 18.24,46.65 CA33.1
  Bottom 0.254: v15.85,44.3 15.44,44.3 14.99,43.85 IC1.3
VPLL  (via drill 0.8)
  Top 0.254: CA37.1 11.92,46.98 CA34.+ 14.57,46.98 L4.1 14.85,45.5 14.15,44.8 v13.74,44.8
  Bottom 0.254: v13.74,44.8 13.04,44.8 12.49,44.25 IC1.8
XIN
  Top 0.254: 10.47,35.4 Y1.1 10.6,33.91 CA24.1 10.94,33.03 11.91,32.07 12.7,32.07 12.86,31.91 12.86,30.98 UA1.36
XIN1
  Bottom 0.254: CA47.1 19.47,38.85 Y2.1 18.67,38.78 18.24,39.2 18.24,41.4 17.95,41.7 16.45,41.7 15.99,42.15 IC1.1
XOUT
  Top 0.254: UA1.35 13.34,31.91 14.29,32.86 14.29,33.97 14.76,34.29 15.72,34.29 16.51,35.08 16.51,35.71 CA25.1 16.51,35.73 16.51,36.35 15.9,36.96 Y1.3
XOUT1
  Bottom 0.254: Y2.3 17.02,40.55 CA46.1 15.49,40.6 IC1.2
XUSB  (via drill 0.8)
  Top 0.254: R28.1 5.29,45.05 4.64,44.4 4.64,42.1 5.14,41.6 6.44,41.6 X3.VBUS 7.7,37.05 v7.95,36.8 7.95,29 9.04,27.91 UA1.39
  Bottom 0.254: 7.7,33.75 L7.2 | CA35.1 7.6,33.65 L7.2 | v7.95,36.8 7.95,34 L7.2

## Text on the board
tPlace: 4,7uF | 10n | 10k | 4,7uF | 39k | 0.1uF | 4,7uF | L6 | 0.1uF | 0.1uF | RESET | 1k | L4 | 0.1u | 10k | 10k | 0.1uF | 10k | 0.1u | GND | 0.1u | 4,7uF | 1u | 0.1u | var1 | RX | 220R | 0.1u | 1u | LTC | var2 | TX | 0.1u | SA5 | 12MHz | RX | TX | 1k | 10k | 220R | 0.1u | SA4 | 10k | 10k | 10k | 0.1u | 1k | 22p | ATSAM3x8e | SA3 | 0.1u | LTC | 0.1u | 10k | 1k | SA2 | 10k | 10k | 10k | 1k | 10k | 10k | 10k | 10k | SA1 | 0.1u | LTC | 0.1u | 10k | 0.1u | 1k | 0.1u | 10k | 10k | 10k | GND | 3,3V
bPlace: 0.1u | 0.1u | 0.1u | 0.1u | 0.1u | 0.1u | 10u | 22p | 0.1u | 0.1u | 0.1u | 22p | 12k | 10u | 10u | L7 MMZ | WE-CBF | 0.1u | 0.1u | 10u | 0.1u | 0.1u | 0.1u | 0.1u | WE-CBF | 0.1u | 0.1u | 0.1u | 1k | 0.1u | 100k | 0.1u | 0.1u | J0402 | WE-CBF | 0.1u | 0.1u | 0.1u | 0.1u | WE-CBF | 10u | 0.1u | 0.1u | 0.1u